# Altium PCB Probe4RackV1.1.PcbDoc
Units mm, origin at the board's own origin, x right, y up, seen from the top; angles counter-clockwise.
Board outline 159.99 x 100 mm, 2 copper layers (TopLayer, BottomLayer), stack 1.571 mm thick; 45 components, 65 nets, 248 pads, 0 vias.
Unrouted connection lines stored in the file: 26.
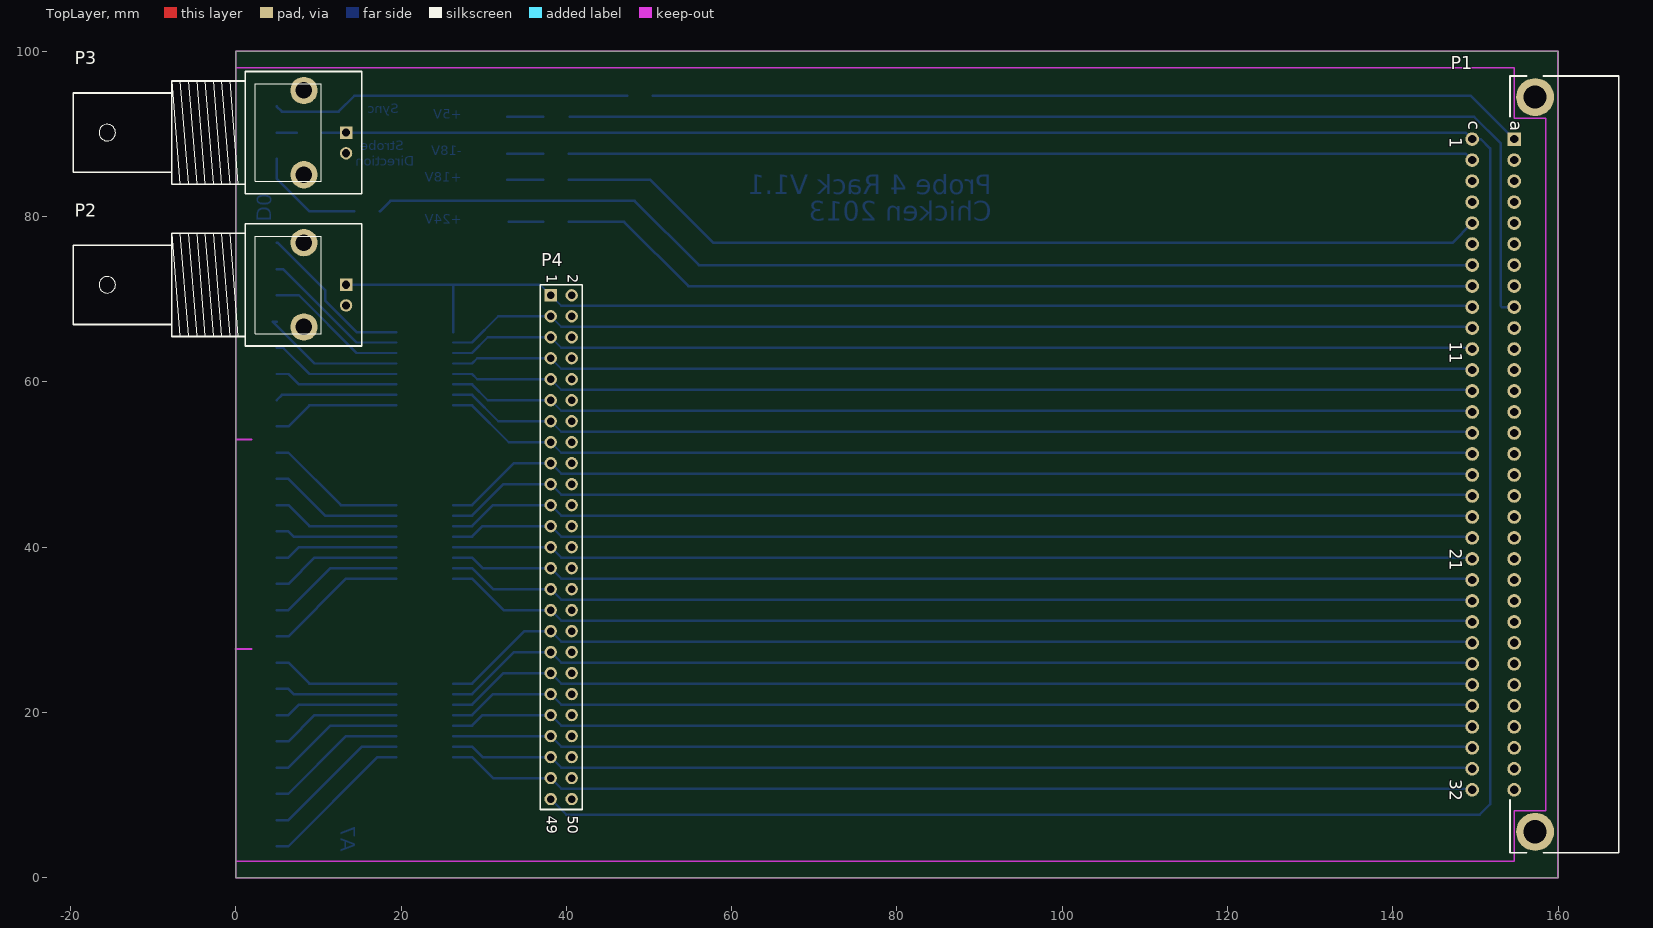
[diagram p0: TopLayer view]
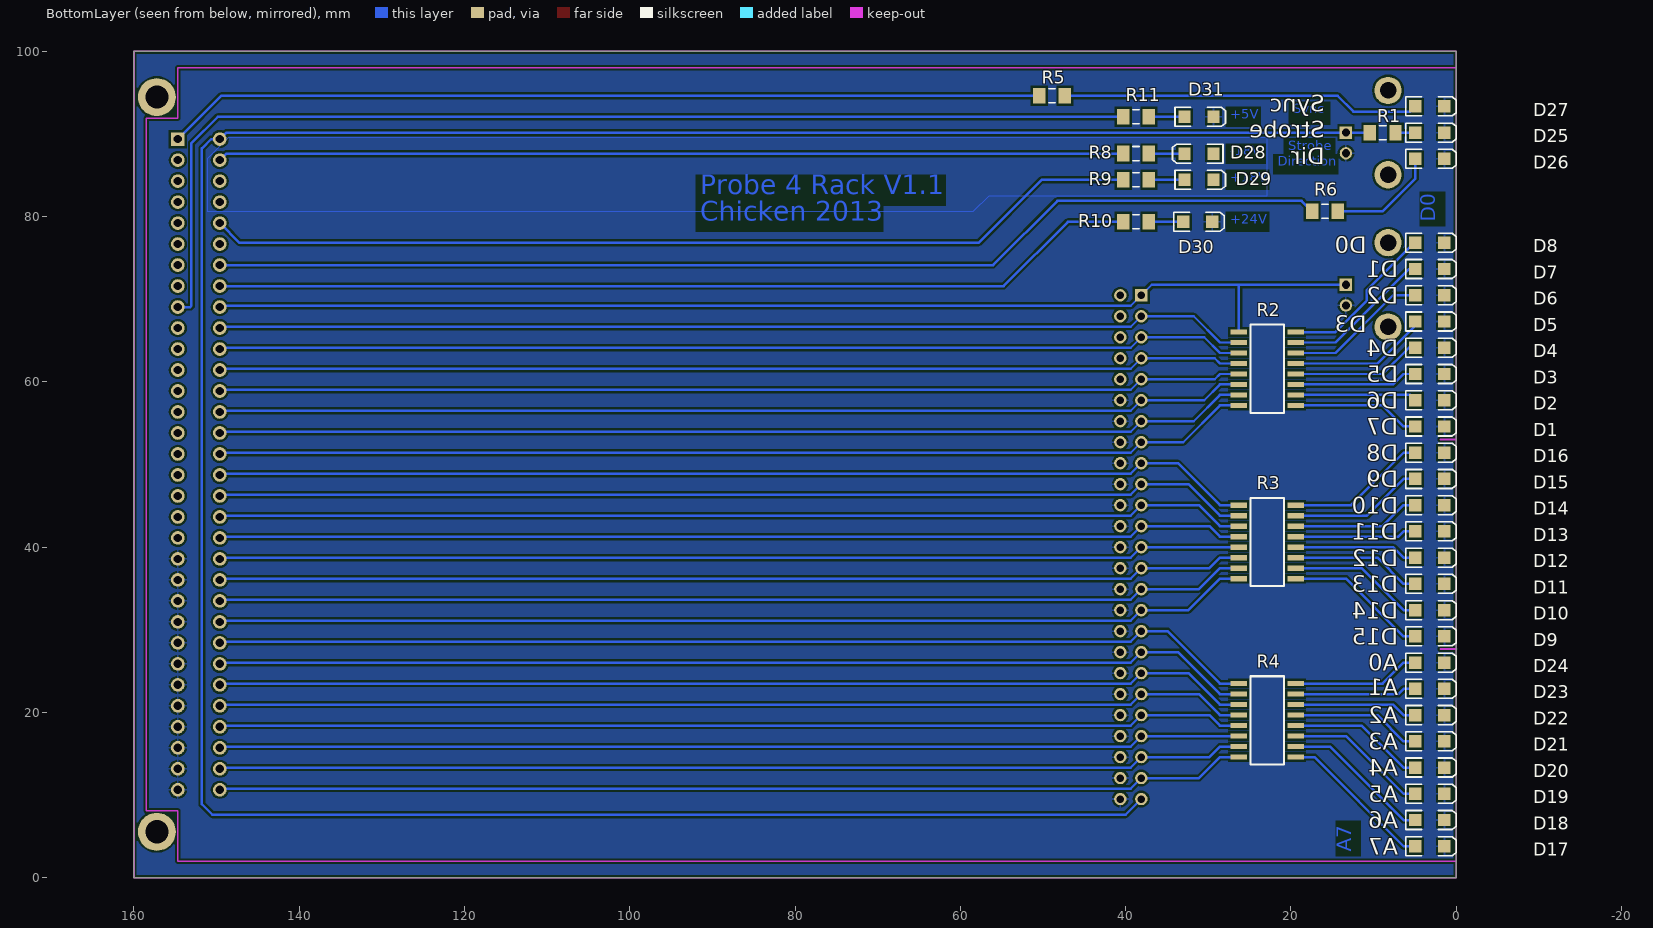
[diagram p1: BottomLayer view, seen from below]

## Layer stack, top to bottom
TopSolder: solder mask 0.0102, Solder Resist, Dk 3.5
TopLayer: signal copper 0.0356
Dielectric1: core 1.5, FR-4, Dk 4.8
BottomLayer: signal copper 0.0356
BottomSolder: solder mask 0.0102, Solder Resist, Dk 3.5

## Board outline
0,0 159.995,0 159.995,100 0,100

## Design rules (kind name [scope] priority, off if disabled: settings)
Clearance [All] p1: gap=0.254
FabricationTestPointUsage TestPointUsage [All] p1: valid=0 allowmultiple=FALSE
FabricationTestpoint Testpoint [All] p1: side=3 testpointundercomponent=TRUE minsize=1.016 maxsize=2.54 preferedsize=1.524 minholesize=0.508 maxholesize=1.016 preferedholesize=0.813 testpointgrid=0.025 allowsidetop=TRUE allowsidebottom=TRUE usegrid=TRUE gridtolerance=0
PlaneClearance [All] p1: clearance=0.254
PolygonConnect [All] p1: connectstyle=Relief reliefconductorwidth=0.254 reliefentries=4 polygonreliefangle="90 Angle" airgapwidth=0.254
RoutingVias [All] p1: holewidth=0.6 width=1 viastyle="Through Hole" minholewidth=0.4 minwidth=0.8 maxholewidth=1 maxwidth=2
SilkToSolderMaskClearance SilkscreenOverComponentPads [IsPad] p1: minsilkscreentomaskgap=0.254 clearancetoexposedcopper=TRUE
SolderMaskExpansion [All] p1: expansion=0.051
Width [All] p1: maxlimit=2 minlimit=0.254 preferedwidth=0.3
25 further rules are at their usual default settings.

## Components (designator, comment, footprint, x,y, rotation, side; value= is the part's Value field where it differs from the comment)
D1 "gürn" 3.2X1.6X1.1 3.175,54.61 r180 bottom
D2 "gelb" 3.2X1.6X1.1 3.175,57.785 r180 bottom
D3 "grün" 3.2X1.6X1.1 3.175,60.96 r180 bottom
D4 "gelb" 3.2X1.6X1.1 3.175,64.135 r180 bottom
D5 "grün" 3.2X1.6X1.1 3.175,67.31 r180 bottom
D6 "gelb" 3.2X1.6X1.1 3.175,70.485 r180 bottom
D7 "grün" 3.2X1.6X1.1 3.175,73.66 r180 bottom
D8 "gelb" 3.2X1.6X1.1 3.175,76.835 r180 bottom
D9 "gürn" 3.2X1.6X1.1 3.175,29.21 r180 bottom
D10 "gelb" 3.2X1.6X1.1 3.175,32.385 r180 bottom
D11 "grün" 3.2X1.6X1.1 3.175,35.56 r180 bottom
D12 "gelb" 3.2X1.6X1.1 3.175,38.735 r180 bottom
D13 "grün" 3.2X1.6X1.1 3.175,41.91 r180 bottom
D14 "gelb" 3.2X1.6X1.1 3.175,45.085 r180 bottom
D15 "grün" 3.2X1.6X1.1 3.175,48.26 r180 bottom
D16 "gelb" 3.2X1.6X1.1 3.175,51.435 r180 bottom
D17 "rot" 3.2X1.6X1.1 3.175,3.81 r180 bottom
D18 "rot" 3.2X1.6X1.1 3.175,6.985 r180 bottom
D19 "rot" 3.2X1.6X1.1 3.175,10.16 r180 bottom
D20 "rot" 3.2X1.6X1.1 3.175,13.335 r180 bottom
D21 "rot" 3.2X1.6X1.1 3.175,16.51 r180 bottom
D22 "rot" 3.2X1.6X1.1 3.175,19.685 r180 bottom
D23 "rot" 3.2X1.6X1.1 3.175,22.86 r180 bottom
D24 "rot" 3.2X1.6X1.1 3.175,26.035 r180 bottom
D25 "blau" 3.2X1.6X1.1 3.175,90.17 r180 bottom
D26 "grün" 3.2X1.6X1.1 3.175,86.995 r180 bottom
D27 "rot" 3.2X1.6X1.1 3.175,93.345 r180 bottom
D28 "blue" 3.2X1.6X1.1 31.115,87.63 r0 bottom
D29 "red" 3.2X1.6X1.1 31.115,84.455 r180 bottom
D30 "yellow" 3.2X1.6X1.1 31.27,79.375 r180 bottom
D31 "red" 3.2X1.6X1.1 31.115,92.075 r180 bottom
P1 "2x32 Pin" 0903164X919 159.986,50.013 r270 top
P2 "D0" "BNC_RA CON" 13.335,71.755 r0 top
P3 "Strobe" "BNC_RA CON" 13.335,90.17 r0 top
P4 "Header 25X2" HDR2X25 38.1,70.485 r270 top
R1 "Res2" RESC3216M 8.89,90.17 r180 bottom
R2 "Res Pack4" smd16 22.86,61.595 r180 bottom
R3 "Res Pack4" smd16 22.86,40.64 r180 bottom
R4 "Res Pack4" smd16 22.86,19.05 r180 bottom
R5 "Res2" RESC3216M 48.895,94.615 r0 bottom
R6 "Res2" RESC3216M 15.875,80.645 r180 bottom
R8 "Res2" RESC3216M 38.735,87.63 r180 bottom
R9 "Res2" RESC3216M 38.735,84.455 r180 bottom
R10 "Res2" RESC3216M 38.735,79.375 r180 bottom
R11 "Res2" RESC3216M 38.735,92.075 r180 bottom

## Footprints (in the part's own frame and the unit in brackets; to place one, negate y for a bottom-side part, rotate by r counter-clockwise, add the part's x,y. Pads: shape width x height; smd on the part's side, far side on the other; paste and mask are expansions set on the pad)
3.2X1.6X1.1 [mm] "SMT LED; 2 Flat Leads"
  rect 1.5x1.5 smd: 1(-1.75,0) 2(1.75,0)
  silkscreen extent -2.9,-1.15 3.2,1.15
0903164X919 [mm] "Connector; DIN 41612, Type C, Thru-Hole; Rows a+c, 64 Position; Right Angle"
  round 4.6 hole 2.8: 33(-44.45,-2.76) 34(44.45,-2.76)
  rect 1.65x1.65 hole 1: A1(-39.37,-5.3)
  round 1.65 hole 1: A2(-36.83,-5.3) A3(-34.29,-5.3) A4(-31.75,-5.3) A5(-29.21,-5.3) A6(-26.67,-5.3) A7(-24.13,-5.3) A8(-21.59,-5.3) A9(-19.05,-5.3) A10(-16.51,-5.3) A11(-13.97,-5.3) A12(-11.43,-5.3) A13(-8.89,-5.3) A14(-6.35,-5.3) A15(-3.81,-5.3) A16(-1.27,-5.3) A17(1.27,-5.3) A18(3.81,-5.3) A19(6.35,-5.3) A20(8.89,-5.3) A21(11.43,-5.3) A22(13.97,-5.3) A23(16.51,-5.3) A24(19.05,-5.3) A25(21.59,-5.3) A26(24.13,-5.3) A27(26.67,-5.3) A28(29.21,-5.3) A29(31.75,-5.3) A30(34.29,-5.3) A31(36.83,-5.3) A32(39.37,-5.3) C1(-39.37,-10.38) C2(-36.83,-10.38) C3(-34.29,-10.38) C4(-31.75,-10.38) C5(-29.21,-10.38) C6(-26.67,-10.38) C7(-24.13,-10.38) C8(-21.59,-10.38) C9(-19.05,-10.38) C10(-16.51,-10.38) C11(-13.97,-10.38) C12(-11.43,-10.38) C13(-8.89,-10.38) C14(-6.35,-10.38) C15(-3.81,-10.38) C16(-1.27,-10.38) C17(1.27,-10.38) C18(3.81,-10.38) C19(6.35,-10.38) C20(8.89,-10.38) C21(11.43,-10.38) C22(13.97,-10.38) C23(16.51,-10.38) C24(19.05,-10.38) C25(21.59,-10.38) C26(24.13,-10.38) C27(26.67,-10.38) C28(29.21,-10.38) C29(31.75,-10.38) C30(34.29,-10.38) C31(36.83,-10.38) C32(39.37,-10.38)
  KeepOutLayer lines w0.1: 47,0 -47,0
  silkscreen extent -47,-5.8 47,7.34
"BNC_RA CON" [mm] "Connector; BNC Elbow"
  rect 1.5x1.5 hole 1: 1(0,0)
  round 3.3 hole 2: 2(-5.1,-5.1) 2(-5.1,5.1)
  round 1.5 hole 1: 2(0,-2.5)
  silkscreen extent -33,-7.4 1.9,7.4
HDR2X25 [mm] "Connector; Header; 25x2 Position"
  rect 1.5x1.5 hole 0.9: 1(0,0)
  round 1.5 hole 0.9: 2(0,2.54) 3(2.54,0) 4(2.54,2.54) 5(5.08,0) 6(5.08,2.54) 7(7.62,0) 8(7.62,2.54) 9(10.16,0) 10(10.16,2.54) 11(12.7,0) 12(12.7,2.54) 13(15.24,0) 14(15.24,2.54) 15(17.78,0) 16(17.78,2.54) 17(20.32,0) 18(20.32,2.54) 19(22.86,0) 20(22.86,2.54) 21(25.4,0) 22(25.4,2.54) 23(27.94,0) 24(27.94,2.54) 25(30.48,0) 26(30.48,2.54) 27(33.02,0) 28(33.02,2.54) 29(35.56,0) 30(35.56,2.54) 31(38.1,0) 32(38.1,2.54) 33(40.64,0) 34(40.64,2.54) 35(43.18,0) 36(43.18,2.54) 37(45.72,0) 38(45.72,2.54) 39(48.26,0) 40(48.26,2.54) 41(50.8,0) 42(50.8,2.54) 43(53.34,0) 44(53.34,2.54) 45(55.88,0) 46(55.88,2.54) 47(58.42,0) 48(58.42,2.54) 49(60.96,0) 50(60.96,2.54)
  silkscreen extent -1.27,-1.27 62.23,3.81
RESC3216M [mm] "Chip Resistor, Body 3.2x1.6mm, IPC Low Density"
  rect 1.5x1.9 smd: 1(-1.55,0) 2(1.55,0)
  silkscreen extent -0.4,-0.85 0.4,0.85, body extent -1.68,-0.87 1.68,0.87, height 0.71
smd16 [mil]
  rect 79x25 smd: 1(-135,175) 2(-135,125) 3(-135,75) 4(-135,25) 5(-135,-25) 6(-135,-75) 7(-135,-125) 8(-135,-175) 9(135,-175) 10(135,-125) 11(135,-75) 12(135,-25) 13(135,25) 14(135,75) 15(135,125) 16(135,175)
  silkscreen extent -80,-210 80,210

## Part data
D1 D2 D3 D4 D5 D6 D7 D8 D9 D10 D11 D12 D13 D14 D15 D16 D17 D18 D19 D20 D21 D22 D23 D24 D25 D26 D27 D28 D29 D30 D31: library part LED3, "Typical BLUE SiC LED"
P1: library part "64 Pin Header", "DIN 41612"
P2 P3: library part BNC, "BNC Elbow Connector"
P4: "Header, 25-Pin, Dual row"
R1 R5 R6 R8 R9 R10 R11: "Resistor"
R2 R3 R4: "Isolated Resistor Network"

## Nets (pads, with @x,y where several pads share a name; then routed paths per layer and width w, separated by ;. In a path a pad name is that pad's centre, name@x,y a point inside that pad or via, vN(x,y) a via of type N, cw(c..) or ccw(c..) an arc to the next point about the centre after c; other vN are vias at no path point)
+5V: P1.A9 P1.A10 P1.A11 P1.A12 P1.A13 P1.A14 P1.A15 P1.A16 P1.A17 P1.A18 P1.A19 P1.A20 R11.1 | length 135.3
  BottomLayer w0.3: R11.1@40.41,92.075 149.86,92.075 153.035,88.9 153.035,69.215 153.187,69.063 P1.A9
+18V: P1.A5 P1.A6 P1.C5 P1.C6 R9.1 | length 113.5
  BottomLayer w0.3: R9.1 50.165,84.455 57.785,76.835 147.218,76.835 P1.C5
+24V: P1.A7 P1.A8 P1.C8 R10.1 | length 112.5
  BottomLayer w0.3: R10.1 46.99,79.375 54.762,71.603 P1.C8
-18V: P1.A2 P1.C2 R8.1 | length 109.6
  BottomLayer w0.3: R8.1 148.819,87.63 P1.C2
A0: P1.C25 P4.33 R4.1 | length 126.7
  BottomLayer w0.3: R4.1 28.575,23.495 34.925,29.845 P4.33 39.37,28.575 P1.C25@149.86,28.575
A1: P1.C26 P4.35 R4.2 | length 126.2
  BottomLayer w0.3: R4.2 28.575,22.225 33.655,27.305 P4.35 39.37,26.035 P1.C26@149.86,26.035
A2: P1.C27 P4.37 R4.3 | length 125.7
  BottomLayer w0.3: R4.3 28.575,20.955 32.385,24.765 P4.37 39.37,23.495 P1.C27@149.86,23.495
A3: P1.C28 P4.39 R4.4 | length 125.1
  BottomLayer w0.3: R4.4 28.575,19.685 31.115,22.225 P4.39 39.37,20.955 P1.C28@149.86,20.955
A4: P1.C29 P4.41 R4.5 | length 124.6
  BottomLayer w0.3: R4.5 28.575,18.415 29.845,19.685 P4.41 39.37,18.415 P1.C29@149.86,18.415
A5: P1.C30 P4.43 R4.6 | length 124.1
  BottomLayer w0.3: R4.6 P4.43 39.37,15.875 P1.C30@149.86,15.875
A6: P1.C31 P4.45 R4.7 | length 124.6
  BottomLayer w0.3: R4.7 28.575,15.875 29.845,14.605 P4.45 39.37,13.335 P1.C31@149.86,13.335
A7: P1.C32 P4.47 R4.8 | length 125.1
  BottomLayer w0.3: R4.8 28.575,14.605 31.115,12.065 P4.47 39.37,10.795 P1.C32@149.86,10.795
AGND: D28.1 D29.2 P1.A3 P1.A4 P1.C3 P1.C4
D00: P1.C9 P2.1 P4.1 R2.1 | length 143.3
  BottomLayer w0.3: P2.1 26.289,71.755 ; R2.1 26.289,71.755 ; P1.C9@149.86,69.215 39.37,69.215 P4.1 36.83,71.755 26.289,71.755
D01: P1.C10 P4.3 R2.2 | length 125.4
  BottomLayer w0.3: R2.2 28.575,64.77 31.75,67.945 P4.3 39.37,66.675 P1.C10@149.86,66.675
D02: P1.C11 P4.5 R2.3 | length 124.9
  BottomLayer w0.3: R2.3 28.575,63.5 30.48,65.405 P4.5 39.37,64.135 P1.C11@149.86,64.135
D03: P1.C12 P4.7 R2.4 | length 124.4
  BottomLayer w0.3: R2.4 28.575,62.23 29.21,62.865 P4.7 39.37,61.595 P1.C12@149.86,61.595
D04: P1.C13 P4.9 R2.5 | length 124.4
  BottomLayer w0.3: R2.5 28.575,60.96 29.21,60.325 P4.9 39.37,59.055 P1.C13@149.86,59.055
D05: P1.C14 P4.11 R2.6 | length 124.9
  BottomLayer w0.3: R2.6 28.575,59.69 30.48,57.785 P4.11 39.37,56.515 P1.C14@149.86,56.515
D06: P1.C15 P4.13 R2.7 | length 125.4
  BottomLayer w0.3: R2.7 28.575,58.42 31.75,55.245 P4.13 39.37,53.975 P1.C15@149.86,53.975
D07: P1.C16 P4.15 R2.8 | length 125.9
  BottomLayer w0.3: R2.8 28.575,57.15 33.02,52.705 P4.15 39.37,51.435 P1.C16@149.86,51.435
D08: P1.C17 P4.17 R3.1 | length 126.2
  BottomLayer w0.3: R3.1 28.575,45.085 33.655,50.165 P4.17 39.37,48.895 P1.C17@149.86,48.895
D09: P1.C18 P4.19 R3.2 | length 125.7
  BottomLayer w0.3: R3.2 28.575,43.815 32.385,47.625 P4.19 39.37,46.355 P1.C18@149.86,46.355
D10: P1.C19 P4.21 R3.3 | length 125.1
  BottomLayer w0.3: R3.3 28.575,42.545 31.115,45.085 P4.21 39.37,43.815 P1.C19@149.86,43.815
D11: P1.C20 P4.23 R3.4 | length 124.6
  BottomLayer w0.3: R3.4 28.575,41.275 29.845,42.545 P4.23 39.37,41.275 P1.C20@149.86,41.275
D12: P1.C21 P4.25 R3.5 | length 124.1
  BottomLayer w0.3: R3.5 P4.25 39.37,38.735 P1.C21@149.86,38.735
D13: P1.C22 P4.27 R3.6 | length 124.6
  BottomLayer w0.3: R3.6 28.575,38.735 29.845,37.465 P4.27 39.37,36.195 P1.C22@149.86,36.195
D14: P1.C23 P4.29 R3.7 | length 125.1
  BottomLayer w0.3: R3.7 28.575,37.465 31.115,34.925 P4.29 39.37,33.655 P1.C23@149.86,33.655
D15: P1.C24 P4.31 R3.8 | length 125.7
  BottomLayer w0.3: R3.8 28.575,36.195 32.385,32.385 P4.31 39.37,31.115 P1.C24@149.86,31.115
DGND: D1.2 D2.2 D3.2 D4.2 D5.2 D6.2 D7.2 D8.2 D9.2 D10.2 D11.2 D12.2 D13.2 D14.2 D15.2 D16.2 D17.2 D18.2 D19.2 D20.2 D21.2 D22.2 D23.2 D24.2 D25.2 D26.2 D27.2 D30.2 D31.2 P1.A21 P1.A22 P1.A23 P1.A24 P1.A25 P1.A26 P1.A27 P1.A28 P1.A29 P1.A30 P1.A31 P1.A32 P2.2@13.335,69.255 P3.2@13.335,87.67 P4.12 P4.14 P4.16 P4.18 P4.20 P4.22 P4.24 P4.26 P4.28 P4.30 P4.32 P4.34 P4.36 P4.38 P4.40 P4.42 P4.44 P4.46 P4.48 P4.50
DIRECT: P1.C7 R6.1 | length 135.9
  BottomLayer w0.3: R6.1 18.695,81.915 48.26,81.915 56.032,74.143 P1.C7
NetD1_1: D1.1 R2.9 | length 15.6
  BottomLayer w0.3: D1.1 6.35,54.61 8.89,57.15 R2.9
NetD2_1: D2.1 R2.10 | length 14.8
  BottomLayer w0.3: D2.1 5.56,58.42 R2.10
NetD3_1: D3.1 R2.11 | length 15
  BottomLayer w0.3: D3.1 6.35,60.96 7.62,59.69 R2.11
NetD4_1: D4.1 R2.12 | length 15.8
  BottomLayer w0.3: D4.1 5.715,64.135 8.89,60.96 R2.12
NetD5_1: D5.1 R2.13 | length 17.6
  BottomLayer w0.3: D5.1 4.445,67.31 9.525,62.23 R2.13
NetD6_1: D6.1 R2.14 | length 17.4
  BottomLayer w0.3: D6.1 7.62,70.485 14.605,63.5 R2.14
NetD7_1: D7.1 R2.15 | length 18.2
  BottomLayer w0.3: D7.1 5.715,73.66 14.605,64.77 R2.15
NetD8_1: D8.1 R2.16 | length 19.7
  BottomLayer w0.3: D8.1 5.08,76.835 10.795,71.12 10.795,69.85 14.605,66.04 R2.16
NetD9_1: D9.1 R3.9 | length 17.4
  BottomLayer w0.3: D9.1 6.35,29.21 13.335,36.195 R3.9
NetD10_1: D10.1 R3.10 | length 16.6
  BottomLayer w0.3: D10.1 6.35,32.385 11.43,37.465 R3.10
NetD11_1: D11.1 R3.11 | length 15.8
  BottomLayer w0.3: D11.1 6.35,35.56 9.525,38.735 R3.11
NetD12_1: D12.1 R3.12 | length 15
  BottomLayer w0.3: D12.1 6.35,38.735 7.62,40.005 R3.12
NetD13_1: D13.1 R3.13 | length 14.8
  BottomLayer w0.3: D13.1 6.35,41.91 6.985,41.275 R3.13
NetD14_1: D14.1 R3.14 | length 15.6
  BottomLayer w0.3: D14.1 6.35,45.085 8.89,42.545 R3.14
NetD15_1: D15.1 R3.15 | length 16.3
  BottomLayer w0.3: D15.1 6.35,48.26 10.795,43.815 R3.15
NetD16_1: D16.1 R3.16 | length 17.1
  BottomLayer w0.3: D16.1 6.35,51.435 12.7,45.085 R3.16
NetD17_1: D17.1 R4.9 | length 19
  BottomLayer w0.3: D17.1 6.35,3.81 17.145,14.605 R4.9
NetD18_1: D18.1 R4.10 | length 18.2
  BottomLayer w0.3: D18.1 6.35,6.985 15.24,15.875 R4.10
NetD19_1: D19.1 R4.11 | length 17.4
  BottomLayer w0.3: D19.1 6.35,10.16 13.335,17.145 R4.11
NetD20_1: D20.1 R4.12 | length 16.6
  BottomLayer w0.3: D20.1 6.35,13.335 11.43,18.415 R4.12
NetD21_1: D21.1 R4.13 | length 15.8
  BottomLayer w0.3: D21.1 6.35,16.51 9.525,19.685 R4.13
NetD22_1: D22.1 R4.14 | length 15
  BottomLayer w0.3: D22.1 6.35,19.685 7.62,20.955 R4.14
NetD23_1: D23.1 R4.15 | length 14.8
  BottomLayer w0.3: D23.1 6.35,22.86 6.985,22.225 R4.15
NetD24_1: D24.1 R4.16 | length 15.6
  BottomLayer w0.3: D24.1 6.35,26.035 8.89,23.495 R4.16
NetD25_1: D25.1 R1.2 | length 2.4
  BottomLayer w0.3: D25.1 R1.2
NetD26_1: D26.1 R6.2 | length 13.4
  BottomLayer w0.3: D26.1 4.925,84.61 8.89,80.645 R6.2
NetD27_1: D27.1 R5.1 | length 43.5
  BottomLayer w0.3: D27.1 5.56,92.71 12.42,92.71 14.325,94.615 R5.1
NetD28_2: D28.2 R8.2 | length 4.3
  BottomLayer w0.3: D28.2 R8.2
NetD29_1: D29.1 R9.2 | length 4.3
  BottomLayer w0.3: D29.1 R9.2
NetD30_1: D30.1 R10.2 | length 4.2
  BottomLayer w0.3: D30.1 R10.2
NetD31_1: D31.1 R11.2 | length 4.3
  BottomLayer w0.3: D31.1 R11.2
NetP4_2: P4.2 P4.4 P4.6 P4.8 P4.10
STROBE: P1.C1 P3.1 P4.49 R1.1 | length 336.5
  BottomLayer w0.3: R1.1 P3.1 148.819,90.17 P1.C1 150.647,89.383 151.765,88.265 151.765,8.89 150.495,7.62 40.005,7.62 P4.49
SYNC: P1.A1 R5.2 | length 106.4
  BottomLayer w0.3: R5.2 149.454,94.615 P1.A1
pads on no net: P1.33 P1.34 P2.2@8.235,66.655 P2.2@8.235,76.855 P3.2@8.235,85.07 P3.2@8.235,95.27

## Polygon pours and split planes (outlines as drawn)
AGND on BottomLayer "TopLayer-No Net" (solid, pour order 3): 22.86,89.535 148.59,89.535 151.13,86.995 151.13,80.645 58.42,80.645 56.515,82.55 22.86,82.55
DGND on BottomLayer "BottomLayer-No Net" (solid, pour order 2): 0,0 160,0 160,100 0,100

## Keep-outs
KeepOutLayer:
  lines w0.2: 0,0 159.995,0 159.995,100 0,100 0,0
  lines w0.203: 0,2 0,98 154.686,98 154.686,91.923 158.496,91.923 158.496,8.103 154.686,8.103 154.686,2 0,2
  lines w0.254: -0.025,27.661 1.905,27.661 ; 0,53.035 1.905,53.035

## Other copper
BottomLayer:
  text "Sync" at 19.685,92.075 h2
  text "+5V" at 27.305,91.44 h2
  text "Strobe" at 20.32,87.63 h2
  text "-18V" at 27.305,86.995 h2
  text "Direction" at 21.59,85.725 h2
  text "+18V" at 27.305,83.82 h2
  text "Probe 4 Rack V1.1" at 91.44,81.915 h4
  text "D0" at 1.905,79.375 h3 r270
  text "+24V" at 27.305,78.74 h2
  text "Chicken 2013" at 91.44,78.74 h4
  text "A7" at 12.065,3.175 h3 r270

## Silkscreen, mask and mechanical layers (free items; w line width, h text height)
BottomOverlay:
  text "Sync" at 15.875,92.71 h2
  text "Strobe" at 15.875,89.535 h2
  text "Dir" at 15.875,86.36 h2
  text "D0" at 10.795,75.565 h2
  text "D1" at 6.985,72.644 h2
  text "D2" at 6.985,69.469 h2
  text "D3" at 10.795,66.04 h2
  text "D4" at 6.985,63.119 h2
  text "D5" at 6.985,59.944 h2
  text "D6" at 6.985,56.769 h2
  text "D7" at 6.985,53.594 h2
  text "D8" at 6.985,50.419 h2
  text "D9" at 6.985,47.244 h2
  text "D10" at 6.985,44.069 h2
  text "D11" at 6.985,40.894 h2
  text "D12" at 6.985,37.719 h2
  text "D13" at 6.985,34.544 h2
  text "D14" at 6.985,31.369 h2
  text "D15" at 6.985,28.194 h2
  text "A0" at 6.985,25.019 h2
  text "A1" at 6.985,22.067 h2
  text "A2" at 6.985,18.669 h2
  text "A3" at 6.985,15.494 h2
  text "A4" at 6.985,12.319 h2
  text "A5" at 6.985,9.144 h2
  text "A6" at 6.985,5.969 h2
  text "A7" at 6.985,2.794 h2
Mechanical4:
  lines w0.254: -15.508,1.524 -15,0 ; -15.508,98.476 -15,100 ; -15.254,0 -14.746,0 ; -15.254,100 -14.746,100 ; -15,44.261 -15,0 ; -15,55.739 -15,100 ; -14.492,1.524 -15,0 ; -14.492,98.476 -15,100 ; -4.54,-9 -2,-9 ; -3.524,-9.508 -2,-9 ; -3.524,-8.492 -2,-9 ; -2,-9.254 -2,-8.746 ; -2,0 -2,100 ; 0,-17.754 0,-17.246 ; 0,-9.254 0,-8.746 ; 1.524,-18.008 0,-17.5 ; 1.524,-16.992 0,-17.5 ; 1.524,-9.508 0,-9 ; 1.524,-8.492 0,-9 ; 2.54,-9 0,-9 ; 74.261,-17.5 0,-17.5 ; 85.739,-17.5 160,-17.5 ; 158.476,-18.008 160,-17.5 ; 158.476,-16.992 160,-17.5 ; 160,-17.754 160,-17.246
  text "100 (mm)" at -14.086,44.515 h1.52 r90
  text "2 (mm)" at -5.088,-12.657 h1.52
  text "160 (mm)" at 74.515,-18.414 h1.52

## Text inside footprints (layer, text, board x,y; h text height)
P1: TopOverlay "21" at 146.906,39.833 h1.5 r270; TopOverlay "11" at 146.906,64.858 h1.5 r270; TopOverlay "32" at 146.906,11.893 h1.5 r270; TopOverlay "c" at 149.106,91.593 h1.5 r270; TopOverlay "a" at 154.186,91.593 h1.5 r270; TopOverlay "1" at 146.906,89.633 h1.5 r270; Mechanical1 "PCB Edge" at 160.486,96.483 h0.6 r270
P4: TopOverlay "50" at 40.132,7.493 h1.27 r270; TopOverlay "49" at 37.592,7.493 h1.27 r270; TopOverlay "1" at 37.592,73.025 h1.27 r270; TopOverlay "2" at 40.132,73.025 h1.27 r270